# Altium PCB ECG BT&USB 12ch Ver.2.02.PcbDoc (part 2 of 2)
Units mil, origin at the board's own origin, x right, y up, seen from the top; angles counter-clockwise.
Board outline 2150 x 3445 mil, 4 copper layers (Top Layer, Mid-Layer 1, Mid-Layer 2, Bottom Layer), stack 58.2 mil thick; 151 components, 108 nets, 584 pads, 430 vias.
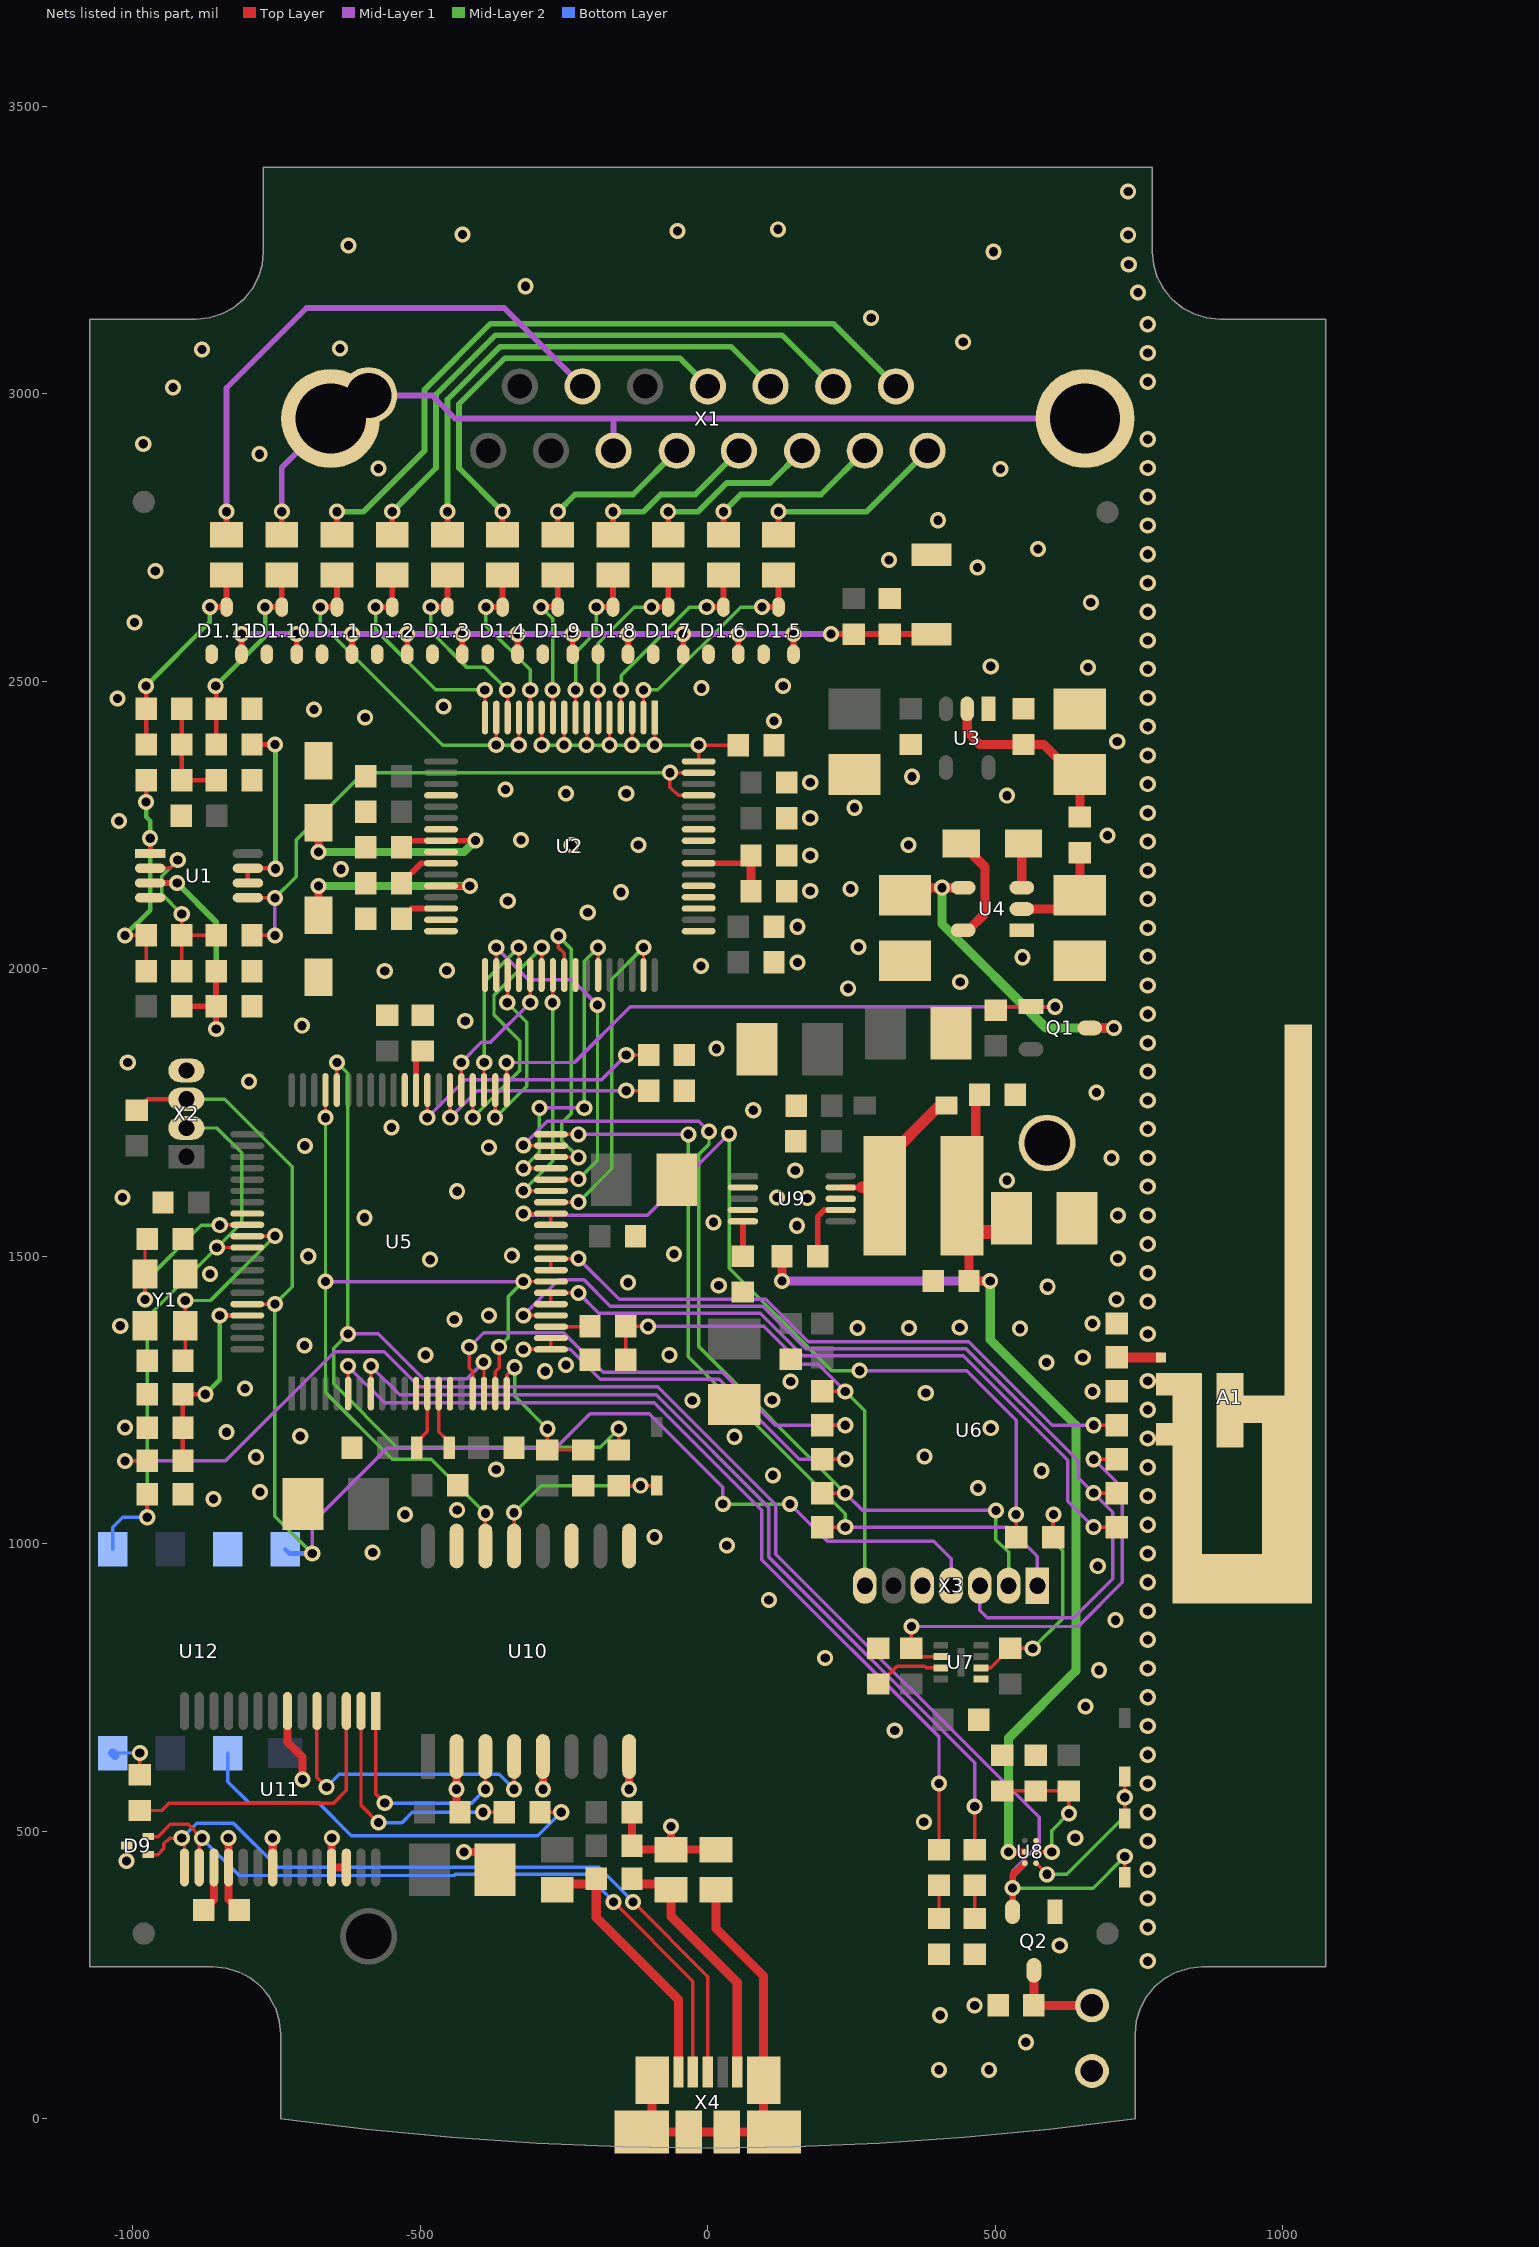
[diagram p4: the nets of this part, all layers, seen from the top]

## Via types
v1: diameter 28, hole 16, Top Layer to Bottom Layer, tented both sides, 430 vias

## Nets (pads, with @x,y where several pads share a name; then routed paths per layer and width w, separated by ;. In a path a pad name is that pad's centre, name@x,y a point inside that pad or via, vN(x,y) a via of type N, cw(c..) or ccw(c..) an arc to the next point about the centre after c; other vN are vias at no path point) (continued)
AGND: A1.2 B-.1 C2.1 C3.1 C5.1 C6.1 C7.1 C9.2 C10.1 C11.M C12.M C13.1 C14.1 C15.1 C16.1 C17.1 C18.1 C19.1 C20.1 C21.1 C22.1 C23.M C24.1 C25.1 C26.M C27.M C29.M C30.1.1 C30.2.1 C31.1 C32.1.1 C32.2.1 C32.3.1 C32.4.1 C32.5.1 C33.1 C34.1 C35.1 C36.1 C37.1 C38.1 C39.1 C40.M C41.1 C42.1 C43.2 C44.1 C45.1 C46.M C47.M C48.M C49.M C50.M C51.1 D1.1.1 D1.2.1 D1.3.1 D1.4.1 D1.5.1 D1.6.1 D1.7.1 D1.8.1 D1.9.1 D1.10.1 D1.11.1 D2.A D5.C D6.C pad.1@590,1697 Q2.1 R7.1 R10.1 R11.1 R14.2 R19.2 R21.2 R23.2 U1.4 U2.20 U2.23 U2.25 U2.31 U2.32 U2.33 U2.41 U2.49 U2.51 U2.52 U2.53 U2.57 U2.58 U3.1 U4.1 U5.12 U5.15 U5.30 U5.50 U5.68 U6.5 U6.7 U7.1 U8.C1 U9.2 U9.4 U9.8 U10.9 U10.11 U10.15 U12.7 X2.4 X3.5 Y1.2 Y1.4
  other v1: 402,85 489,85 553,133 404,180 464,197 765,274 612,301 765,333 765,383 765,433 765,483 639,488 375.6,516 765,533 765,583 765,633 325,675 765,683 657,717 765,733 680,780 765,783 204,801 765,833 709,867 765,883 106,902 765,933 678,961 765,983 -583,985 33,997 -93,1012 765,1033 -527,1051 -436,1058.49 -860,1078 765,1083 -779,1090 470,1097 113,1119 580,1127 -368,1129 765,1133 -786,1151 377,1152 765,1183 46,1186 -709,1187 -837,1194 492,1201 -1014,1202 765,1233 -27,1249 112,1250 379,1262 669,1265 -805,1270 144,1282 765,1283 -283,1300 -247,1311 589,1315 652,1324 -491,1328 -67,1328 -701.53,1345 765,1365 543,1374 260,1375 350,1375 438,1376 -1022,1379 669,1383 -441,1390 -381,1397 765,1421 711,1425 591,1447 19,1449 -139,1454 -866,1469 765,1471 -483,1494 713,1496 -695,1500 -341,1501 -59,1504 765,1521 155,1553 10,1559 -597,1567 713,1571 765,1571 173,1601 -1018,1602 120,1602 -436,1613 765,1621 520,1632 152,1649 702,1671 765,1671 -381,1689 -701,1692 765,1721 -550,1724 79,1754 765,1771 676,1785 -798,1804 765,1821 -1009,1837 15,1861 765,1871 -706,1901 -422,1909 765,1921 244,1966 765,1971 439,1977 -562,1996 -454,1997 -12.15,2005 156,2011 547,2020 765,2021 262,2038 765,2071 156,2073 -209,2098 -348,2118 765,2121 -151,2133 178,2135 248,2139 765,2171 -638,2173 178,2197 -237,2215 -121,2215 349,2215 765,2221 -325,2224 695,2232 -1024,2257 178,2262 765,2271 255,2280 520,2301 -247,2305 -142,2305 -352,2312 765,2321 178,2324 355,2334 765,2371 712,2395 765,2421 115,2431 -596,2437 -685,2451 -460,2456 -1027,2470 765,2471 -11,2488 131,2492 765,2521 661,2524 492,2526 765,2571 -997,2602 765,2621 666,2637 765,2671 -961,2692 469,2698 315,2711 765,2721 574,2730 765,2771 400,2780 765,2821 509,2869 -573,2870 765,2871 -780,2895 -982,2913 765,2921 -930,3011 765,3021 765,3071 -880,3077 -640,3079 444,3090 765,3121 284,3132 748,3176 -317,3187 732,3225 497,3247 -625,3258 731,3276 -427,3277 -53,3283 122,3286 731,3352
B_LED: R24.1 U5.6 | length 1589.7
  Top Layer w6: v1(-626,1309) -625.6,1308.6 U5.6@-625.6,1261 ; R24.1@402,468 v1(402,583)
  Mid-Layer 1 w6: v1(-626,1309) -562,1245 -93,1245 94,1058 94,972 402,664 v1(402,583)
BT_CTS: U5.17 U6.11 | length 854.5
  Top Layer w6: v1(-415,1342) -415,1305 -409,1299 U5.17@-409,1261 ; U6.11@199,1206 v1(239,1206)
  Mid-Layer 1 w6: v1(-415,1342) -390,1367 -251.03,1367 -182.03,1298 24.97,1298 116.97,1206 v1(239,1206)
BT_DSM: U5.25 U5.26 U6.1 | length 1214
  Top Layer w6: U5.25@-273,1416.7 U5.26@-273,1436.4 -225.4,1436.4 v1(-225,1436) ; v1(671,1029) U6.1@711,1029
  Mid-Layer 1 w6: v1(-225,1436) -190,1401 90.97,1401 164.97,1327 444,1327 626,1145 626,1074 v1(671,1029)
BT_LPO: U5.32 U5.33 U6.15 | length 1532.2
  Top Layer w6: v1(-321,1574) -320.8,1574.2 U5.33@-273,1574.2 U5.32@-273,1554.5 ; U6.15@536,1011 v1(536,1051)
  Mid-Layer 1 w6: v1(-321,1574) -318,1571 -105,1571 v1(37,1713) ; v1(264,1301) 450,1301 536,1215 v1(536,1051)
  Mid-Layer 2 w6: v1(37,1713) 37,1479 215,1301 v1(264,1301)
BT_LS: U5.28 U5.29 U6.4 | length 1124
  Top Layer w6: U5.28@-273,1475.8 U5.29@-273,1495.5 -225.5,1495.5 v1(-225,1496) ; v1(671,1206) U6.4@711,1206
  Mid-Layer 1 w6: v1(-225,1496) -154,1425 100.91,1425 174.91,1351 453.94,1351 598.94,1206 v1(671,1206)
BT_RST: R16.2 U5.23 | length 68.2
  Top Layer w6: U5.23@-273,1377.4 -205.6,1377.4 R16.2@-205,1378
BT_RTS: U5.21 U5.22 U6.12 | length 746.8
  Top Layer w6: v1(-321,1338) U5.21@-273,1338 U5.22@-273,1357.7 ; U6.12@199,1147 v1(239,1147)
  Mid-Layer 1 w6: v1(-321,1338) -239,1338 -187,1286 20,1286 159,1147 v1(239,1147)
BT_RXD: U5.39 U6.13 X3.2 | length 1592.8
  Top Layer w6: v1(-321,1693) -320.3,1692.3 U5.39@-273,1692.3 ; U6.13@199,1088 v1(239,1088)
  Mid-Layer 1 w6: v1(-321,1693) -279,1735 -16,1735 v1(2,1717) ; v1(239,1088) 269,1058 v1(501,1058)
  Mid-Layer 2 w6: v1(2,1717) 2,1695 -16,1677 -16,1343 v1(239,1088) ; v1(501,1058) 501,1007 523,985 X3.2@523,927
BT_TXD: U5.40 U6.14 X3.1 | length 1481.2
  Top Layer w6: U5.40@-273,1712 v1(-225,1712) ; U6.14@199,1029 v1(239,1029)
  Mid-Layer 1 w6: v1(-225,1712) v1(-34,1712) ; v1(239,1029) 522,1029 573,978 X3.1@573,927
  Mid-Layer 2 w6: v1(-34,1712) -34,1325 239,1052 v1(239,1029)
BT_WU: U5.24 U6.2 X3.3 | length 1746.5
  Top Layer w6: v1(-321,1397) U5.24@-273,1397 ; v1(671,1088) U6.2@711,1088
  Mid-Layer 1 w6: v1(-321,1397) -259,1459 -215.47,1459 -169.47,1413 95.94,1413 169.94,1339 448.97,1339 644,1143.97 644,1115 v1(671,1088) 704,1055 704,939 636,871 486,871 473,884 X3.3@473,927
ECG_ANON: Q1.1 R13.2 U5.41 | length 1147.7
  Top Layer w6: U5.41@-350,1789 v1(-350,1837) ; R13.2@501,1928 507,1934 Q1.1@562,1934 v1(604,1934)
  Mid-Layer 1 w6: v1(-350,1837) -232,1837 -135,1934 v1(604,1934)
ECG_CH: R11.2 U5.48 | length 478.2
  Top Layer w6: v1(-488,1741) -487.8,1741.2 U5.48@-487.8,1789 ; v1(-142,1850) R11.2@-103,1850
  Mid-Layer 1 w6: v1(-488,1741) -422,1807 -185,1807 v1(-142,1850)
ECG_CLK: U2.37 U5.45 | length 259.3
  Top Layer w6: v1(-429,1837) -428.7,1836.7 U5.45@-428.7,1789 ; v1(-309,1941) -308.8,1941.2 U2.37@-308.8,1989
  Mid-Layer 1 w6: v1(-429,1837) -394,1872 -378,1872 v1(-309,1941)
ECG_CS: U2.39 U5.35 | length 444.5
  Top Layer w6: v1(-321,1614) -320.6,1613.6 U5.35@-273,1613.6 ; v1(-270,1941) -269.5,1941.5 U2.39@-269.5,1989
  Mid-Layer 2 w6: v1(-321,1614) -270,1665 v1(-270,1941)
ECG_DIN: U2.34 U5.36 | length 630.4
  Top Layer w6: U2.34@-368,1989 v1(-368,2037) ; U5.36@-273,1633.3 -225.7,1633.3 v1(-225,1634)
  Mid-Layer 1 w6: v1(-368,2037) -312,1981 -236,1981 v1(-192,1937)
  Mid-Layer 2 w6: v1(-225,1634) -192,1667 v1(-192,1937)
ECG_DOUT: U2.43 U5.37 | length 582
  Top Layer w6: v1(-321,1653) U5.37@-273,1653 ; v1(-191,2037) -190.8,2036.8 U2.43@-190.8,1989
  Mid-Layer 1 w6: v1(-293,1758) v1(-215,1758)
  Mid-Layer 2 w6: v1(-321,1653) -293,1681 v1(-293,1758) ; v1@-215,1757 -215,2013 v1(-191,2037) v1@-190,2036
ECG_DRDY: U2.47 U5.34 | length 585.8
  Top Layer w6: U5.34@-273,1593.9 -225.1,1593.9 v1(-225,1594) ; U2.47@-112,1989 v1(-112,2037)
  Mid-Layer 2 w6: v1(-225,1594) -167,1652 -167,1982 v1(-112,2037)
ECG_PWDN: U2.35 U5.42 | length 333.3
  Top Layer w6: v1(-370,1741) -369.7,1741.3 U5.42@-369.7,1789 ; v1(-349,1941) -348.3,1941.7 U2.35@-348.3,1989
  Mid-Layer 2 w6: v1(-370,1741) -315,1796 -315,1907 v1(-349,1941)
ECG_RST: U2.38 U5.44 | length 479.1
  Top Layer w6: v1(-409,1741) U5.44@-409,1789 ; U2.38@-289.2,1989 -289.2,2036.8 v1(-289,2037)
  Mid-Layer 2 w6: v1(-409,1741) -327,1823 -327,1875 -372,1920 -372,1954 v1(-289,2037)
ECG_SCLK: U2.40 U5.38 | length 533.2
  Top Layer w6: U5.38@-273,1672.6 -225.6,1672.6 v1(-225,1672) ; v1(-260,2057) -260,2037 -249.8,2026.8 U2.40@-249.8,1989
  Mid-Layer 2 w6: v1(-260,2057) -238,2035 -238,1748 -254,1732 -254,1701 v1(-225,1672)
ECG_STRT: U2.36 U5.43 | length 321.2
  Top Layer w6: U5.43@-389.4,1789 -389.4,1836.6 v1(-389,1837) ; v1(-329,2037) -328.6,2036.6 U2.36@-328.6,1989
  Mid-Layer 2 w6: v1(-389,1837) -389,1977 v1(-329,2037)
ECG_TYPE: R10.2 U5.46 | length 412.6
  Top Layer w6: U5.46@-448.4,1789 -448.4,1741.4 v1(-448,1741) ; v1(-142,1788) R10.2@-103,1788
  Mid-Layer 1 w6: v1(-448,1741) -401,1788 v1(-142,1788)
FOUT: D1.3.3 R1.3.2 U2.14 | length 350.5
  Top Layer w6: v1(-349,2485) -348.3,2484.3 U2.14@-348.3,2437
  Top Layer w10: v1(-482,2629) D1.3.3@-453,2629 R1.3.2@-453,2685
  Mid-Layer 2 w6: v1(-482,2629) -482,2587 -419,2524 -388,2524 v1(-349,2485)
G_LED: R25.1 U5.8 | length 1585.3
  Top Layer w6: U5.8@-586.2,1261 -586.2,1308.8 v1(-586,1309) ; R25.1@464,468 v1(464,543)
  Mid-Layer 1 w6: v1(-586,1309) -536,1259 -90.03,1259 106,1062.97 106,976.97 464,618.97 v1(464,543)
GND_IZO: C52.1 C53.1 C54.M C55.1 C56.1 D9.3 L2.2.1 L2.3.1 U10.2 U10.5 U10.8 U11.7 U11.18 U11.21 U11.25 U11.26 | length 944.8
  Top Layer w6: v1(-1011,448) D9.3@-1011,475
  Top Layer w14: v1(-834,488) -833.6,487.6 U11.18@-833.6,437 -833.6,381.6 C53.1@-815,363 ; v1(-757,488) -756.8,487.8 U11.21@-756.8,437 ; U11.7@-731.2,709 -731.2,655.2 -705,629 v1(-705,590) ; v1(-654,488) -654.4,487.6 U11.25@-654.4,437 U11.26@-628.8,437 ; U10.2@-437,630 v1(-437,573) -437,539 C52.1@-431,533 ; v1(-424,464) -401,464 C54.M@-370,433 ; v1(-287,573) U10.5@-287,630 ; v1(-137,573) U10.8@-137,630 ; C55.1@-132,533 C56.1@-132,475 -125,468 L2.2.1@-64,468 ; v1(-64,508) L2.2.1@-64,468 ; L2.3.1@14,468 L2.2.1@-64,468
LOUT: D1.2.3 R1.2.2 U2.16 | length 405.7
  Top Layer w6: v1(-388,2485) -387.6,2484.6 U2.16@-387.6,2437
  Top Layer w10: v1(-578,2629) D1.2.3@-549,2629 R1.2.2@-549,2685
  Mid-Layer 2 w6: v1(-578,2629) -578,2590 -473,2485 v1(-388,2485)
NetA1_1: A1.1 U6.6 | length 75
  Top Layer w18: U6.6@713,1324 A1.1@788,1324
NetB+_1: B+.1 C36.2 Q2.3 | length 162
  Top Layer w16: Q2.3@567,258 C36.2@567,197 B+.1@668,197
NetC4_1: C4.1 R5.2 R8.1 U1.1 | length 416.7
  Top Layer w6: v1(-1014,2058) R5.2@-977,2058 C4.1@-977,1996
  Top Layer w8: v1(-977,2290) R8.1@-977,2328 ; U1.1@-970,2200.4 v1(-970,2227)
  Mid-Layer 2 w8: v1(-1014,2058) -970,2102 v1(-970,2227) -970,2257 -977,2264 v1(-977,2290)
NetC4_2: C4.2 R4.2 R5.1 U1.2 | length 333
  Top Layer w6: U1.2@-970,2174.8 -936.2,2174.8 v1(-922,2189) ; C4.2@-915,1996 R5.1@-915,2058 ; v1(-915,2095) R5.1@-915,2058 ; R4.2@-855,2058 R5.1@-915,2058
  Mid-Layer 2 w6: v1(-922,2189) -950,2161 -950,2130 v1(-915,2095)
NetC5_2: C5.2 R6.1 R7.2 U1.3 | length 490.2
  Top Layer w10: U1.3@-970,2149.2 -923.2,2149.2 v1(-923,2149) ; R6.1@-915,1935 R7.2@-855,1935 ; v1(-855,1895) R7.2@-855,1935 ; C5.2@-855,1996 R7.2@-855,1935
  Mid-Layer 2 w10: v1(-923,2149) -855,2081 v1(-855,1895)
NetC6_2: C6.2 C8.2 R8.2 R9.1 | length 184
  Top Layer w8: C8.2@-915,2452 R9.1@-915,2390 R8.2@-915,2328 C6.2@-855,2328
NetC9_1: C9.1 U2.1 U2.3 U2.5 U2.7 U2.9 U2.11 U2.64 | length 659.2
  Top Layer w6: U2.11@-289.2,2437 -289.2,2389.2 v1(-289,2389) ; v1(-250,2389) -249.8,2389.2 U2.9@-249.8,2437 ; v1(-211,2389) -210.5,2389.5 U2.7@-210.5,2437 ; U2.5@-171.1,2437 -171.1,2389.1 v1(-171,2389) ; v1(-132,2389) -131.7,2389.3 U2.3@-131.7,2437 ; v1(-93,2389) -92.4,2389.6 U2.1@-92.4,2437 ; U2.64@-16,2360.6 v1(-16,2389) C9.1@53,2389
  Mid-Layer 2 w6: v1(-289,2389) v1(-250,2389) v1(-211,2389) v1(-171,2389) v1(-132,2389) v1(-93,2389) v1(-16,2389)
NetC10_2: C10.2 C11.P U2.24 | length 466.3
  Top Layer w10: C10.2@-533,2211 -521.2,2222.8 U2.24@-464,2222.8 -404.2,2222.8 v1(-404,2223)
  Top Layer w14: v1(-677,2203) C11.P@-677,2254
  Mid-Layer 2 w14: v1(-677,2203) -424,2203 v1(-404,2223)
NetC12_P: C12.P U2.28 | length 364
  Top Layer w10: U2.28@-464,2144.1 -414.1,2144.1 v1(-414,2144)
  Top Layer w14: C12.P@-677,2093 v1(-677,2144)
  Mid-Layer 2 w14: v1(-677,2144) v1(-414,2144)
NetC13_2: C13.2 U2.30 | length 76.3
  Top Layer w10: C13.2@-533,2087 -515.3,2104.7 U2.30@-464,2104.7
NetC14_2: C14.2 C15.2 U2.55 | length 158.6
  Top Layer w10: U2.55@-16,2183.5 61.5,2183.5 C14.2@75,2197
  Top Layer w16: C15.2@75,2135 C14.2@75,2197
NetC16_2: C16.2 U2.26 | length 83.3
  Top Layer w10: C16.2@-533,2149 -498.5,2183.5 U2.26@-464,2183.5
NetC23_P: C23.P C24.2 R12.2 U3.2 | length 340.7
  Top Layer w16: U3.2@451,2452 451,2412 473,2390 C24.2@549,2390 584,2390 636,2338 C23.P@647,2338 R12.2@647,2264
NetC27_P: C27.P Q1.3 U4.4 | length 585.4
  Top Layer w16: C27.P@343,2128 356,2141 v1(407,2141) U4.4@444,2141 ; Q1.3@664,1897 v1(706,1897)
  Mid-Layer 2 w16: v1(407,2141) 407,2078 588,1897 v1(706,1897)
NetC28_M: C28.M U4.3 | length 78.2
  Top Layer w16: U4.3@546,2141 546,2215 C28.M@549,2218
NetC28_P: C28.P U4.5 | length 189
  Top Layer w16: C28.P@441,2218 482,2177 482,2096 453,2067 U4.5@444,2067
NetC31_2: C31.2 U5.49 | length 80.9
  Top Layer w10: U5.49@-507.5,1789 -507.5,1847.5 -498,1857 C31.2@-498,1848
NetC33_2: C33.2 R16.1 U6.10 X3.7 | length 878.9
  Top Layer w6: C33.2@-143,1320 R16.1@-143,1378 v1(-104,1378) ; U6.10@199,1265 v1(239,1265)
  Mid-Layer 1 w6: v1(-104,1378) 97,1378 163,1312 192,1312 v1(239,1265)
  Mid-Layer 2 w6: v1(239,1265) 273,1231 X3.7@273,927
NetC37_2: C37.2 R20.2 R21.1 U8.B1 | length 261.6
  Top Layer w6: C37.2@512,570 R21.1@570,570 R20.2@628,570 v1(628,531) ; U8.B1@570.8,464 v1(598,464)
  Mid-Layer 2 w6: v1(598,464) 598,501 v1(628,531)
NetC40_P: C40.P C41.2 C42.2 L1.1 R27.1 U8.B2 | length 1932.2
  Top Layer w12: v1(523,464) U8.B2@551.2,464
  Top Layer w16: v1(129,1457) R27.1@129,1500 ; L1.1@442,1605 466,1629 466,1774.5 C41.2@472.5,1781 ; L1.1@454,1542 C42.2@454,1457 v1(491,1457)
  Top Layer w24: L1.1@454,1542 503.5,1542 C40.P@528,1566.5
  Mid-Layer 1 w16: v1@128,1457 v1(129,1457) v1(491,1457)
  Mid-Layer 2 w16: v1(491,1457) 491,1355 640,1206 640,779 523,662 v1(523,464)
NetC43_1: C43.1 U9.5 | length 60.6
  Top Layer w10: C43.1@61,1500 U9.5@61,1560.6
NetC53_2: C53.2 U11.17 | length 81.4
  Top Layer w14: C53.2@-877,363 -859.2,380.8 U11.17@-859.2,437
NetC57_1: C57.1 L2.2.2 X4.5 | length 440.5
  Top Layer w16: C57.1@-132,417 -123,408 -74,408 L2.2.2@-64,398 -64,352 51,237 X4.5@51,81
NetC57_2: C57.2 L2.1.2 X4.1 | length 471.1
  Top Layer w16: L2.1.2@-262,398 -252,408 -203,408 C57.2@-194,417 -194,350 -51,207 X4.1@-51,81
NetD3_A: D3.A Q2.2 R22.2 U8.A2 | length 2582.6
  Top Layer w6: v1(-1014,1144) R22.2@-975,1144 ; D3.A@725,420 v1(725,456)
  Top Layer w12: Q2.2@530,360 530.2,360.2 530.2,423.4 U8.A2@551.2,444.4
  Mid-Layer 1 w6: v1(-1014,1144) -839,1144 -649,1334 -563,1334 -502,1273 -87.06,1273 118,1067.94 118,981.94 576,523.94 576,477 530,431 v1(530,401)
  Mid-Layer 2 w6: v1(530,401) 670,401 v1(725,456)
NetD3_C: D3.C D4.C U8.A1 | length 310.2
  Top Layer w6: U8.A1@570.8,444.4 570.8,444.2 v1(590,425) ; D3.C@725,522 v1(725,559) D4.C@725,595
  Mid-Layer 2 w6: v1(590,425) 624,425 638,439 725,526 v1(725,559)
NetD5_A: D5.A R24.2 | length 58
  Top Layer w6: D5.A@402,348 R24.2@402,406
NetD6_A: D6.A R25.2 | length 58
  Top Layer w6: D6.A@464,348 R25.2@464,406
NetD7_A: D7.A L1.2 U9.9 | length 270.7
  Top Layer w10: U9.9@231,1619.7 268,1619.7
  Top Layer w20: 268,1619.7 L1.2@293.3,1619.7 ; L1.2@308,1605 308,1667 403,1762 D7.A@415,1762
NetD8_A: D8.A R28.1 U10.13 | length 363.5
  Top Layer w6: U10.13@-337,996 v1(-337,1054) ; R28.1@-155,1101 v1(-117,1101) D8.A@-89,1101
  Mid-Layer 2 w6: v1(-337,1054) -290,1101 v1(-117,1101)
NetD9_1: D9.1 U11.15 X4.3 | length 1329.9
  Top Layer w6: D9.1@-973,459.3 -956.7,459.3 -946,470 -946,478 -936,488 v1(-915,488) -910.3,483.3 U11.15@-910.3,437 ; v1(-130,377) 0,247 X4.3@0,81
  Bottom Layer w6: v1(-915,488) -889,514 -825,514 -748,437 -190,437 v1(-130,377)
NetD9_2: D9.2 U11.16 X4.2 | length 1281.5
  Top Layer w6: D9.2@-973,490.7 -956.3,490.7 -935,512 -904,512 v1(-880,488) -884.7,483.3 U11.16@-884.7,437 ; v1(-164,377) -26,239 X4.2@-26,81
  Bottom Layer w6: v1(-880,488) -815,423 -441.53,423 -439.53,425 -212,425 v1(-164,377)
NetL2.3_2: L2.3.2 X4.CASE | length 804.4
  Top Layer w16: X4.CASE@-97,67 -97,-5 X4.CASE@-115,-23 X4.CASE@-33,-23 X4.CASE@33,-23 X4.CASE@115,-23 97,-5 X4.CASE@97,67 97,248 14,331 L2.3.2@14,398 L2.3.2@4,408
NetR1.1_1: R1.1.1 X1.9 | length 1254.6
  Top Layer w10: R1.1.1@-645,2755 v1(-645,2795)
  Mid-Layer 2 w10: v1(-645,2795) -599,2795 -493,2901 -493,3006.85 -377.85,3122 218,3122 X1.9@327,3013
NetR1.2_1: R1.2.1 X1.10 | length 1045.8
  Top Layer w10: R1.2.1@-549,2755 v1(-549,2795)
  Mid-Layer 2 w10: v1(-549,2795) -473,2871 -473,2998.57 -369.57,3102 129,3102 X1.10@218,3013
NetR1.3_1: R1.3.1 X1.11 | length 863.9
  Top Layer w10: R1.3.1@-453,2755 v1(-453,2795)
  Mid-Layer 2 w10: v1(-453,2795) -453,2990.28 -361.28,3082 40,3082 X1.11@109,3013
NetR1.4_1: R1.4.1 X1.12 | length 744.9
  Top Layer w10: R1.4.1@-357,2755 v1(-357,2795)
  Mid-Layer 2 w10: v1(-357,2795) -433,2871 -433,2982 -353,3062 -49,3062 X1.12@0,3013
NetR1.5_1: R1.5.1 X1.1 | length 342.9
  Top Layer w10: R1.5.1@123,2755 v1(123,2795)
  Mid-Layer 2 w10: v1(123,2795) 276,2795 X1.1@382,2901
NetR1.6_1: R1.6.1 X1.2 | length 329.9
  Top Layer w10: R1.6.1@27,2755 v1(27,2795)
  Mid-Layer 2 w10: v1(27,2795) 57,2825 197,2825 X1.2@273,2901
NetR1.7_1: R1.7.1 X1.3 | length 316.9
  Top Layer w10: R1.7.1@-69,2755 v1(-69,2795)
  Mid-Layer 2 w10: v1(-69,2795) -17,2795 33,2845 108,2845 X1.3@164,2901
NetR1.8_1: R1.8.1 X1.4 | length 302.9
  Top Layer w10: R1.8.1@-165,2755 v1(-165,2795)
  Mid-Layer 2 w10: v1(-165,2795) -112,2795 -82,2825 -22,2825 X1.4@54,2901
NetR1.9_1: R1.9.1 X1.5 | length 290.9
  Top Layer w10: R1.9.1@-261,2755 v1(-261,2795)
  Mid-Layer 2 w10: v1(-261,2795) -231,2825 -130,2825 X1.5@-54,2901
NetR1.10_1: pad.1@-590,2997 R1.10.1 X1.6 X1.H1 X1.H2 | length 1638.3
  Top Layer w10: R1.10.1@-741,2755 v1(-741,2795)
  Mid-Layer 1 w10: v1(-741,2795) -741,2872 X1.H2@-656,2957 -616,2997 pad.1@-590,2997 -480,2997 -440,2957 -164,2957 ; X1.6@-164,2901 -164,2957 ; X1.H1@656,2957 -164,2957
NetR1.11_1: R1.11.1 X1.14 | length 987.9
  Top Layer w10: R1.11.1@-837,2755 v1(-837,2795)
  Mid-Layer 1 w10: v1(-837,2795) -837,3010 -698,3149 -354,3149 X1.14@-218,3013
NetR3_1: R3.1 U1.6 U1.7 | length 330.6
  Top Layer w8: U1.6@-800.2,2149 U1.6@-800,2149.2 U1.7@-800,2174.8 -752.8,2174.8 v1(-752,2174) ; R3.1@-793,2390 v1(-753,2390)
  Mid-Layer 2 w8: v1(-753,2390) -752,2389 v1(-752,2174)
NetR4_1: R4.1 U1.5 U2.61 U2.63 | length 1098
  Top Layer w6: U1.5@-800,2123.6 -753.6,2123.6 v1(-753,2123) ; R4.1@-793,2058 v1(-753,2058) ; U2.61@-16,2301.6 -51.6,2301.6 -66,2316 v1(-66,2341) U2.63@-16,2341
  Mid-Layer 1 w6: v1(-753,2058) v1(-753,2123)
  Mid-Layer 2 w6: v1(-753,2123) -716,2160 -716,2224 -599,2341 v1(-66,2341)
NetR17_1: R17.1 U6.3 U7.6 | length 768.5
  Top Layer w6: v1(354,856) R17.1@354,818 368.2,803.8 U7.6@405,803.8 ; v1(671,1147) U6.3@711,1147
  Mid-Layer 1 w6: v1(354,856) 644,856 721,933 721,1097 v1(671,1147)
NetR18_1: R18.1 U6.16 U7.2 | length 405.2
  Top Layer w6: U7.2@475,784.2 492.2,784.2 R18.1@526,818 v1(565,818) ; U6.16@601,1011 v1(601,1051)
  Mid-Layer 2 w6: v1(565,818) 617,870 617,988 601,1004 v1(601,1051)
NetR19_1: R19.1 U7.7 | length 123.2
  Top Layer w6: R19.1@296,756 298,756 329,787 377,787 380,784 404.8,784 U7.7@405,784.2
NetR27_2: R27.2 U9.7 | length 107.7
  Top Layer w10: R27.2@191,1506 191,1569 202.3,1580.3 U9.7@231,1580.3
NetR29_1: R29.1 U11.3 | length 480.6
  Top Layer w6: R29.1@-988,536 -950,536 -937,549 -651,549 -628.8,571.2 U11.3@-628.8,678
NetR29_2: R29.2 U12.4 | length 90.7
  Top Layer w6: R29.2@-988,598 v1(-988,636)
  Bottom Layer w6: U12.4@-1035,636 v1(-988,636)
  Bottom Layer w16: U12.4@-1035,636 U12.4@-1031,632
NetR30_1: R30.1 U11.2 | length 402
  Top Layer w6: U11.2@-603.3,678 -603.3,545.3 v1(-573,515) ; v1(-391,533) R30.1@-354,533
  Bottom Layer w6: v1(-573,515) -532,515 -514,533 v1(-391,533)
NetR30_2: R30.2 U12.2 | length 722.9
  Top Layer w6: R30.2@-292,533 v1(-255,533)
  Bottom Layer w6: U12.2@-835,636 -835,586 -798,549 -677,549 -620,492 -296,492 v1(-255,533)
NetU10_3: U10.3 U11.1 | length 377.4
  Top Layer w6: U11.1@-577.7,678 -577.7,564.7 v1(-562,549) ; v1(-387,573) U10.3@-387,630
  Bottom Layer w6: v1(-562,549) -411,549 v1(-387,573)
NetU10_4: U10.4 U11.5 | length 510.9
  Top Layer w6: U11.5@-680,678 -680,594 v1(-663,577) ; v1(-337,573) U10.4@-337,630
  Bottom Layer w6: v1(-663,577) -641,599 -363,599 v1(-337,573)
NOUT: C8.1 D1.11.3 R1.11.2 R9.2 | length 370
  Top Layer w8: R9.2@-977,2390 C8.1@-977,2452 v1(-977,2492)
  Top Layer w10: v1(-866,2629) D1.11.3@-837,2629 R1.11.2@-837,2685
  Mid-Layer 2 w8: v1(-977,2492) -866,2603 v1(-866,2629)
RESET: R15.1 U5.76 U12.8 X2.3 X3.4 | length 2534.7
  Top Layer w6: U5.76@-801,1416.7 v1@-766,1416.7
  Top Layer w8: R15.1@-993,1754 -974,1773 X2.3@-907,1773
  Mid-Layer 1 w6: v1(-688,983) -688,1036 -558,1166 -265,1166 -205,1226 -102,1226 26,1098 v1(26,1069) ; v1(143,1069) 208,1004 393,1004 423,974 X3.4@423,927
  Mid-Layer 2 w6: X2.3@-907,1773 -840,1773 -723,1656 -723,1447 v1(-753,1417) -753,1048 v1(-688,983) ; v1(26,1069) v1(143,1069)
  Bottom Layer w8: U12.8@-735,990 -728,983 v1(-688,983)
ROUT: D1.1.3 R1.1.2 U2.13 U2.15 | length 641.6
  Top Layer w6: v1(-368,2389) U2.15@-368,2437 ; v1(-329,2389) -328.6,2389.4 U2.13@-328.6,2437
  Top Layer w10: v1(-674,2629) D1.1.3@-645,2629 R1.1.2@-645,2685
  Mid-Layer 2 w6: v1(-674,2629) -674,2601.64 -461.36,2389 -402.36,2389 v1(-368,2389) v1(-329,2389)
SCOUT: C3.2 D1.10.3 R1.10.2 R3.2 | length 360
  Top Layer w8: v1(-856,2492) -855,2491 C3.2@-855,2452 R3.2@-855,2390
  Top Layer w10: v1(-770,2629) D1.10.3@-741,2629 R1.10.2@-741,2685
  Mid-Layer 2 w8: v1(-856,2492) -770,2578 v1(-770,2629)
TEST: R14.1 U5.71 U12.5 X2.2 | length 1009.9
  Top Layer w6: v1(-975,1046) R14.1@-975,1086 ; v1@-849,1515 -848.8,1515.2 U5.71@-801,1515.2
  Mid-Layer 2 w6: v1(-975,1046) -975,1394 v1(-854,1515) -811,1558 -811,1680 -854,1723 X2.2@-907,1723
  Bottom Layer w6: U12.5@-1035,990 -1035,1029 -1018,1046 v1(-975,1046)
USB_RXD: U5.19 U5.27 U5.57 U10.14 | length 1555.2
  Top Layer w6: v1(-665,1741) U5.57@-665,1789 ; U10.14@-387,996 v1(-387,1053) ; U5.19@-369.7,1261 -369.7,1299.3 -363,1306 v1(-363,1342) ; v1(-321,1456) -320.9,1456.1 U5.27@-273,1456.1
  Mid-Layer 1 w6: v1(-665,1456) v1(-321,1456)
  Mid-Layer 2 w6: v1(-665,1741) -665,1263 -549,1147 -481,1147 v1(-387,1053) ; v1(-363,1342) -347,1358 -347,1430 v1(-321,1456)
USB_TXD: R28.2 U5.18 U5.56 | length 1552.7
  Top Layer w6: U5.56@-645.3,1789 -645.3,1836.7 v1(-645,1837) ; v1(-390,1316) -389.4,1315.4 U5.18@-389.4,1261 ; R28.2@-155,1163 v1(-155,1200)
  Mid-Layer 1 w6: v1(-626,1365) -573,1365 -495,1287 -419,1287 v1(-390,1316)
  Mid-Layer 2 w6: v1(-645,1837) -626,1818 v1(-626,1365) -651,1340 -651,1278 -541,1168 -187,1168 v1(-155,1200)
V1OUT: D1.4.3 R1.4.2 U2.12 | length 308.9
  Top Layer w6: v1(-309,2485) -308.9,2484.9 U2.12@-308.9,2437
  Top Layer w10: v1(-386,2629) D1.4.3@-357,2629 R1.4.2@-357,2685
  Mid-Layer 2 w6: v1(-386,2629) -386,2597 -309,2520 v1(-309,2485)
V2OUT: D1.5.3 R1.5.2 U2.2 | length 398.6
  Top Layer w6: U2.2@-112,2437 v1(-112,2485)
  Top Layer w10: v1(94,2629) D1.5.3@123,2629 R1.5.2@123,2685
  Mid-Layer 2 w6: v1(-112,2485) -87,2485 57,2629 v1(94,2629)
V3OUT: D1.6.3 R1.6.2 U2.4 | length 356.5
  Top Layer w6: U2.4@-151.4,2437 -151.4,2484.6 v1(-151,2485)
  Top Layer w10: v1(-2,2629) D1.6.3@27,2629 R1.6.2@27,2685
  Mid-Layer 2 w6: v1(-151,2485) -151,2510 -32,2629 v1(-2,2629)
V4OUT: D1.7.3 R1.7.2 U2.6 | length 333.2
  Top Layer w6: v1(-191,2485) -190.8,2484.8 U2.6@-190.8,2437
  Top Layer w10: v1(-98,2629) D1.7.3@-69,2629 R1.7.2@-69,2685
  Mid-Layer 2 w6: v1(-191,2485) -191,2566 -128,2629 v1(-98,2629)
V5OUT: D1.8.3 R1.8.2 U2.8 | length 292
  Top Layer w6: U2.8@-230.2,2437 -230.2,2484.8 v1(-230,2485)
  Top Layer w10: v1(-194,2629) D1.8.3@-165,2629 R1.8.2@-165,2685
  Mid-Layer 2 w6: v1(-230,2485) -230,2550 -194,2586 v1(-194,2629)
V6OUT: D1.9.3 R1.9.2 U2.10 | length 285.5
  Top Layer w6: v1(-270,2485) -269.5,2484.5 U2.10@-269.5,2437
  Top Layer w10: v1(-290,2629) D1.9.3@-261,2629 R1.9.2@-261,2685
  Mid-Layer 2 w6: v1(-290,2629) -270,2609 v1(-270,2485)
VBAT: C38.2 R22.1 R23.1 U5.77 | length 350.4
  Top Layer w8: R22.1@-913,1144 C38.2@-913,1202 R23.1@-913,1260 v1(-874,1260) ; v1(-849,1397) U5.77@-801,1397
  Mid-Layer 2 w8: v1(-874,1260) -849,1285 v1(-849,1397)
VMUX: C29.P R12.1 U4.2 | length 184.9
  Top Layer w16: U4.2@546,2104 623,2104 C29.P@647,2128 R12.1@647,2202
VPROT: C2.2 D1.1.2 D1.2.2 D1.3.2 D1.4.2 D1.5.2 D1.6.2 D1.7.2 D1.8.2 D1.9.2 D1.10.2 D1.11.2 D2.C R2.1 | length 1585
  Top Layer w10: D1.11.2@-811,2547 v1(-811,2582) ; D1.10.2@-715,2547 v1(-715,2582) ; D1.1.2@-619,2547 v1(-619,2582) ; D1.2.2@-523,2547 v1(-523,2582) ; D1.3.2@-427,2547 v1(-427,2582) ; D1.4.2@-331,2547 v1(-331,2582) ; D1.9.2@-235,2547 v1(-235,2582) ; D1.8.2@-139,2547 v1(-139,2582) ; D1.7.2@-43,2547 v1(-43,2582) ; D1.6.2@53,2547 v1(53,2582) ; D1.5.2@149,2547 v1(149,2582) ; v1(214,2582) R2.1@254,2582 C2.2@316,2582 D2.C@389,2582
  Mid-Layer 1 w10: v1(-811,2582) v1(-715,2582) v1(-619,2582) v1(-523,2582) v1(-427,2582) v1(-331,2582) v1(-235,2582) v1(-139,2582) v1(-43,2582) v1(53,2582) v1(149,2582) v1(214,2582)
VUSB: C39.2 R26.1 U5.20 | length 281.4
  Top Layer w6: U5.20@-350,1261 -350,1293 v1(-336,1307) ; v1(-279,1200) R26.1@-279,1163 C39.2@-217,1163
  Mid-Layer 2 w6: v1(-336,1307) -336,1257 v1(-279,1200)
XT2IN: C30.2.2 U5.69 Y1.3 | length 356.5
  Top Layer w6: v1(-979,1425) Y1.3@-979,1469 -979,1526 C30.2.2@-975,1530 ; v1(-849,1554) -848.5,1554.5 U5.69@-801,1554.5
  Mid-Layer 2 w6: v1(-979,1425) -979,1456 -881,1554 v1(-849,1554)
XT2OUT: C30.1.2 U5.70 Y1.1 | length 357.1
  Top Layer w6: C30.1.2@-913,1318 -909,1322 Y1.1@-909,1379 v1(-909,1423) ; U5.70@-801,1534.8 -753.2,1534.8 v1(-753,1535)
  Mid-Layer 2 w6: v1(-909,1423) -865,1423 v1(-753,1535)
XTIN: U5.13 Y2.1 | length 101.5
  Top Layer w6: Y2.1@-506,1167 -506,1177 -487.8,1195.2 U5.13@-487.8,1261
XTOUT: U5.14 Y2.2 | length 101.5
  Top Layer w6: U5.14@-468.1,1261 -468.1,1195.1 -450,1177 Y2.2@-450,1167
pads on no net: MARK1.1 MARK2.1 MARK3.1 MARK4.1 U2.17 U2.18 U2.27 U2.29 U2.42 U2.44 U2.45 U2.46 U2.60 U2.62 U3.4 U3.5 U5.1 U5.2 U5.3 U5.4 U5.5 U5.7 U5.9 U5.10 U5.47 U5.52 U5.53 U5.54 U5.55 U5.58 U5.59 U5.60 U5.61 U5.62 U5.63 U5.64 U5.65 U5.66 U5.72 U5.73 U5.74 U5.75 U5.78 U5.79 U5.80 U6.9 U7.3 U7.4 U7.5 U7.PPDAD U9.3 U10.7 U10.10 U10.12 U11.6 U11.8 U11.9 U11.10 U11.11 U11.12 U11.13 U11.14 U11.22 U11.23 U11.24 U11.27 U11.28 X1.7 X1.8 X1.13 X1.15 X4.4

## Polygon pours and split planes (outlines as drawn)
AGND on Bottom Layer "BOTGND" (hatched 90Degree grid 3 track 6, remove dead copper, pour order 7): 1075,-1 1075,3394 -1076,3394 -1076,-1
GND_IZO on Mid-Layer 1 "IN1GND" (hatched 45Degree grid 3 track 6, remove dead copper, pour order 11): -1044,354 -1044,718 -74.86,718 159,482 156.03,479 156.03,354
5VIZO on Mid-Layer 2 "IN2vdd" (hatched 45Degree grid 3 track 6, remove dead copper, pour order 12): -1044,354 -1044,718 -114.52,718 156,445 156,354
AGND on Top Layer "TOPGNDADD" (hatched 45Degree grid 3 track 6, remove dead copper, pour order 10): 810,1294 753,1294 753,1265 810,1265
AGND on Top Layer "TOPGND" (hatched 90Degree grid 3 track 6, remove dead copper, pour order 8): 776,-1 776,3394 -1076,3394 -1076,-1

## Keep-outs
Top Layer:
  lines w2: -1065,960 -504,960 ; -120,960 -92,960 -9,877
Mid-Layer 1:
  lines w2: -1065,665 -85,665 69,511 69,354 ; -1055,354 156,354
Mid-Layer 2:
  lines w2: -1065,665 -85,665 69,511 69,354 ; -1055,354 156,354
Bottom Layer:
  lines w2: -1055,354 156,354 ; -697,960 -92,960 -9,877 ; 788,1164 788,1340
Keep-Out Layer:
  lines w2: 788,261 788,1164 ; 788,1340 788,3159
  lines w10: -1075,561 -1075,1048 ; 1075,622 1075,2032
  lines w40: -1075,561 -1075,264 -860,264 -837.17,261.75 -815.23,255.09 -795,244.28 -777.27,229.73 -762.72,212 -751.91,191.77 -745.25,169.82 -743,147 -743,0 -211,0 ; -1075,1048 -1075,3130 -890,3130 -867.17,3132.25 -845.23,3138.91 -825,3149.72 -807.27,3164.27 -792.72,3182 -781.91,3202.23 -775.25,3224.17 -773,3247 -773,3394 773,3394 773,3247 775.25,3224.17 781.91,3202.23 792.72,3182 807.27,3164.27 825,3149.72 845.23,3138.91 867.17,3132.25 890,3130 1075,3130 1075,2032 ; 264,0 743,0 743,147 745.25,169.82 751.91,191.77 762.72,212 777.27,229.73 795,244.28 815.23,255.09 837.17,261.75 860,264 1075,264 1075,622
  lines w190: -1056,813 -1025,844 -109,844 264,471 264,0

## Other copper
Top Layer:
  pour cut-out: -520,972 -112,972 -112,903 -111,902 -122,891 -521,891
  pour cut-out: -1044,1054 -1044,963 -1072,963 -1072,1054
  pour cut-out: -274,3141 -274,3259 245,3259 245,3141
  text "ECG BT&USB 12ch" at -251,3210 h32
  text "Ver.2.02 05/2015" at -257,3158 h32
Bottom Layer:
  pour cut-out: -1044,1054 -1044,972 -670.65,972 -670,971.35 -670,907 -1068,907 -1072,911 -1072,1054
  text "+" at 596,177 h40
  text "-" at 570,61 h40

## Silkscreen, mask and mechanical layers (free items; w line width, h text height)
Mechanical 1:
  lines w1: -1075,264 -860,264 -837.18,261.75 -815.23,255.09 -795,244.28 -777.27,229.73 -762.72,212 -751.91,191.77 -745.25,169.82 -743,147 -743,0 -595.07,-18.34 -446.7,-32.62 -297.98,-42.83 -149.05,-48.96 0,-51 149.05,-48.96 297.98,-42.83 446.69,-32.62 595.07,-18.34 743,0 743,147 745.25,169.82 751.91,191.77 762.72,212 777.27,229.73 795,244.28 815.23,255.09 837.17,261.75 860,264 1075,264 1075,3130 890,3130 867.17,3132.25 845.23,3138.91 825,3149.72 807.27,3164.27 792.72,3182 781.91,3202.23 775.25,3224.17 773,3247 773,3394 -773,3394 -773,3247 -775.25,3224.17 -781.91,3202.23 -792.72,3182 -807.27,3164.27 -825,3149.72 -845.23,3138.91 -867.18,3132.25 -890,3130 -1075,3130 -1075,872 -705,872 cw(c-705,813) -705,754 -1075,754 -1075,264 ; -504,754 cw(c-504,813) -504,872 -120,872 cw(c-120,813) -120,754 -504,754
Mechanical 4:
  lines w10: 27,2795 57,2825
Mechanical 13:
  lines w6: -1075,264 -860,264 -837.18,261.75 -815.23,255.09 -795,244.28 -777.27,229.73 -762.72,212 -751.91,191.77 -745.25,169.82 -743,147 -743,0 -595.07,-18.34 -446.7,-32.62 -297.98,-42.83 -149.05,-48.96 0,-51 149.05,-48.96 297.98,-42.83 446.69,-32.62 595.07,-18.34 743,0 743,147 745.25,169.82 751.91,191.77 762.72,212 777.27,229.73 795,244.28 815.23,255.09 837.17,261.75 860,264 1075,264 1075,3130 890,3130 867.17,3132.25 845.23,3138.91 825,3149.72 807.27,3164.27 792.72,3182 781.91,3202.23 775.25,3224.17 773,3247 773,3394 -773,3394 -773,3247 -775.25,3224.17 -781.91,3202.23 -792.72,3182 -807.27,3164.27 -825,3149.72 -845.23,3138.91 -867.18,3132.25 -890,3130 -1075,3130 -1075,872 -705,872 -694,871 -683,868 -672,862 -663,855 -656,846 -650,835 -647,824 -646,813 -647,800 -651,788 -656,780 -662,772 -672,764 -681,759 -694,755 -705,754 -1075,754 -1075,264 ; -563,813 -562,823 -559,835 -553,846 -546,855 -537,862 -528,867 -516,871 -504,872 -120,872 -109,871 -98,868 -89,863 -80,857 -71,846 -65,835 -62,824 -61,813 -62,800 -66,789 -72,778 -79,770 -88,763 -98,758 -109,755 -120,754 -504,754 -515,755 -526,758 -537,764 -546,771 -553,780 -558,789 -562,800 -563,813
  text "ECG BT&USB 12ch" at -251,3210 h32
  text "Ver.2.02 05/2015" at -257,3158 h32
Mechanical 14:
  lines w6: -1075,264 -860,264 -837.18,261.75 -815.23,255.09 -795,244.28 -777.27,229.73 -762.72,212 -751.91,191.77 -745.25,169.82 -743,147 -743,0 -595.07,-18.34 -446.7,-32.62 -297.98,-42.83 -149.05,-48.96 0,-51 149.05,-48.96 297.98,-42.83 446.69,-32.62 595.07,-18.34 743,0 743,147 745.25,169.82 751.91,191.77 762.72,212 777.27,229.73 795,244.28 815.23,255.09 837.17,261.75 860,264 1075,264 1075,3130 890,3130 867.17,3132.25 845.23,3138.91 825,3149.72 807.27,3164.27 792.72,3182 781.91,3202.23 775.25,3224.17 773,3247 773,3394 -773,3394 -773,3247 -775.25,3224.17 -781.91,3202.23 -792.72,3182 -807.27,3164.27 -825,3149.72 -845.23,3138.91 -867.18,3132.25 -890,3130 -1075,3130 -1075,872 -705,872 -694,871 -683,868 -672,862 -663,855 -656,846 -650,835 -647,824 -646,813 -647,800 -651,788 -656,780 -662,772 -672,764 -681,759 -694,755 -705,754 -1075,754 -1075,264 ; -563,813 -562,823 -559,835 -553,846 -546,855 -537,862 -528,867 -516,871 -504,872 -120,872 -109,871 -98,868 -89,863 -80,857 -71,846 -65,835 -62,824 -61,813 -62,800 -66,789 -72,778 -79,770 -88,763 -98,758 -109,755 -120,754 -504,754 -515,755 -526,758 -537,764 -546,771 -553,780 -558,789 -562,800 -563,813